# Altium PCB TTFT_LIS2DS12.PcbDoc
Units mil, origin at the board's own origin, x right, y up, seen from the top; angles counter-clockwise.
Board outline 6000 x 4000 mil, 2 copper layers (Top Layer, Bottom Layer); 23 components, 27 nets, 123 pads, 0 vias.
Unrouted connection lines stored in the file: 78.
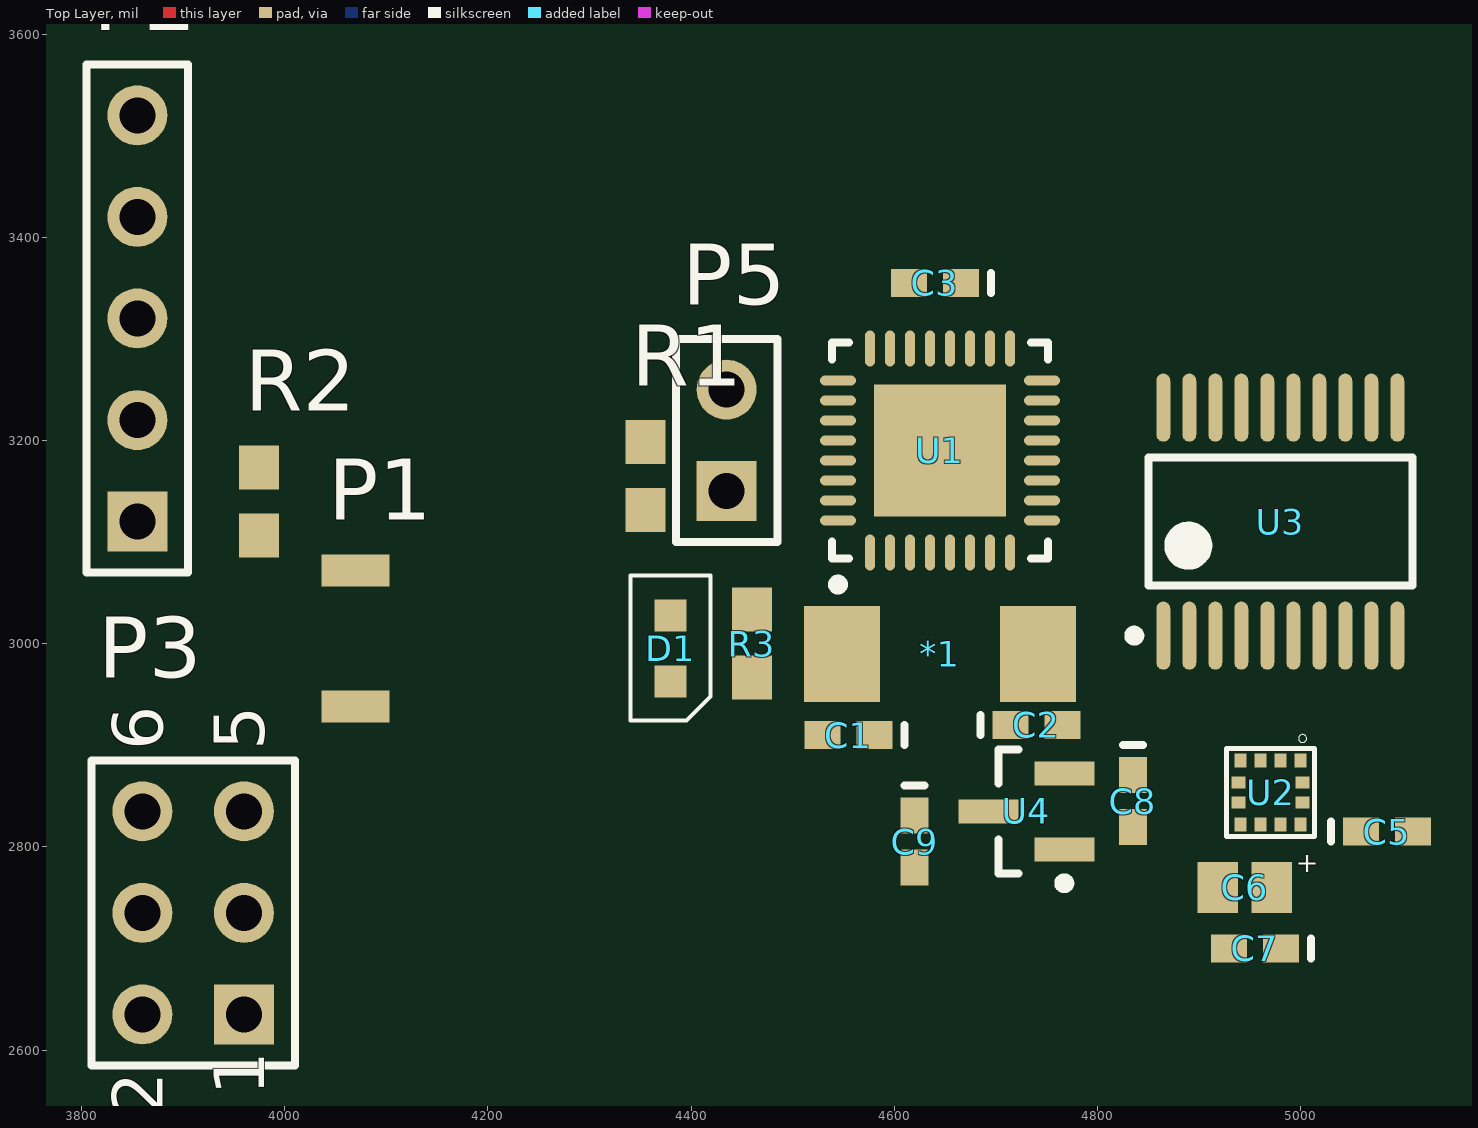
[diagram p0: Top Layer view]
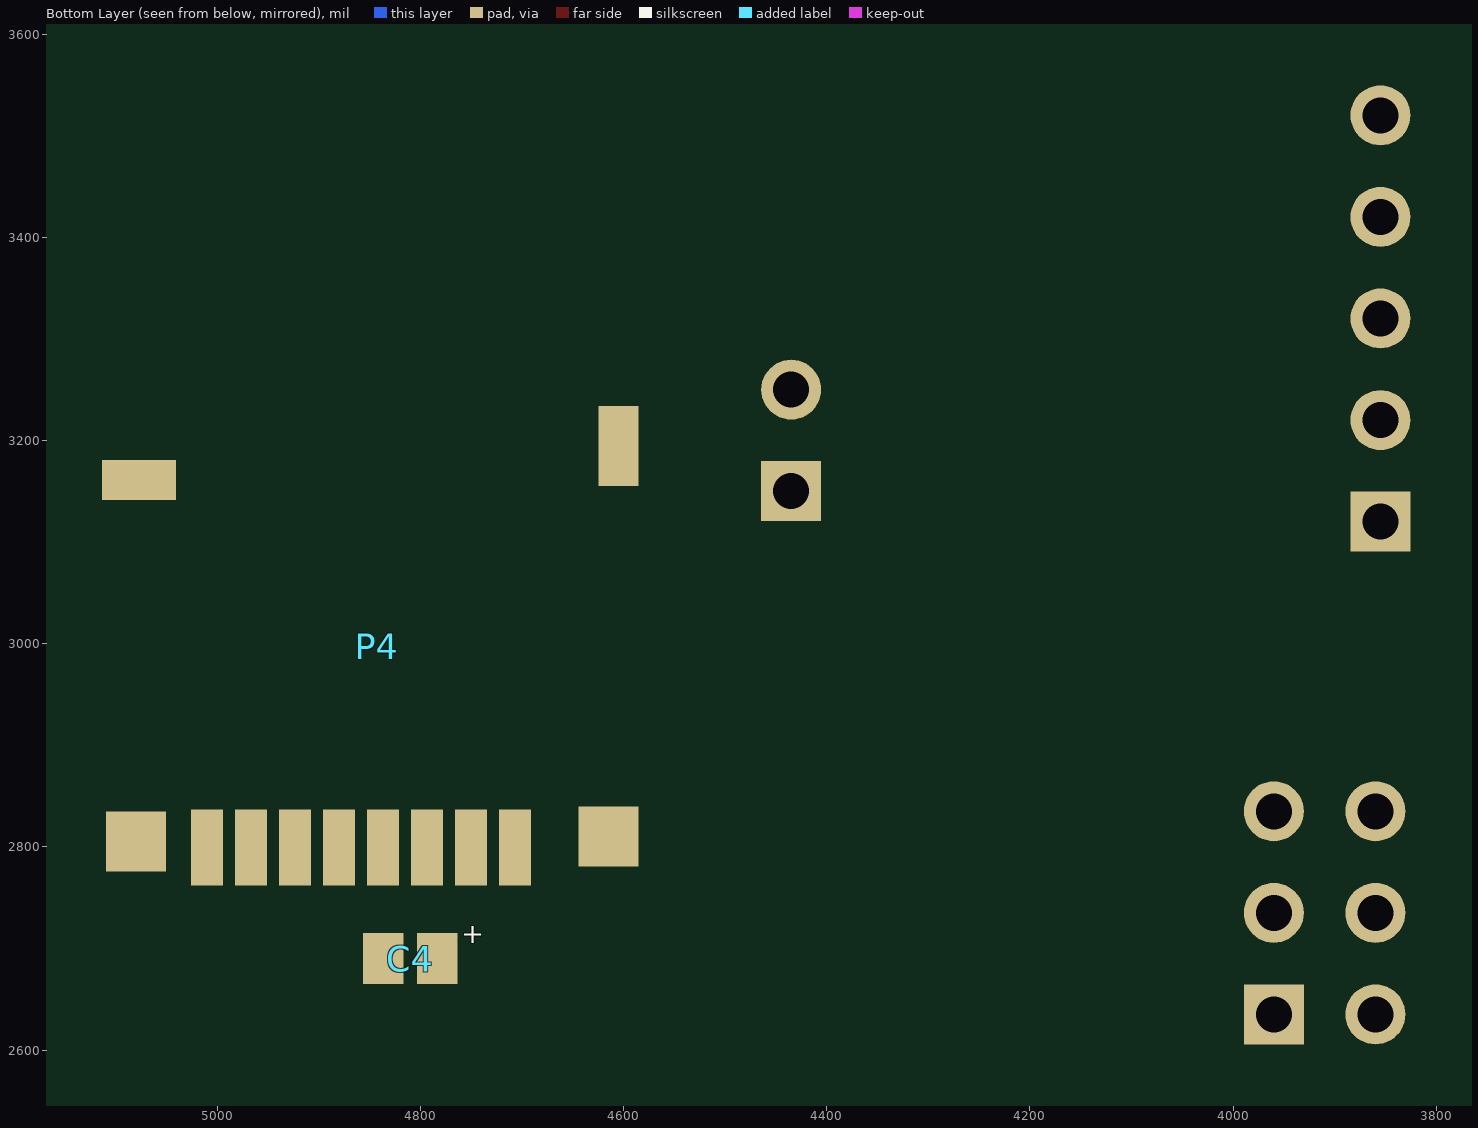
[diagram p1: Bottom Layer view, seen from below]

## Layer stack, top to bottom
Top Solder: solder mask 0.4, Solder Resist, Dk 3.5
Top Layer: signal copper 1.4
Dielectric 1: dielectric 12.6, FR-4, Dk 4.8
Bottom Layer: signal copper 1.4
Bottom Solder: solder mask 0.4, Solder Resist, Dk 3.5

## Board outline
1000,1000 7000,1000 7000,5000 1000,5000

## Design rules (kind name [scope] priority, off if disabled: settings)
Clearance [All] p1: gap=10
PolygonConnect [All] p1: connectstyle=Relief reliefconductorwidth=10 reliefentries=4 polygonreliefangle="90 Angle" airgapwidth=10
RoomDefinition TTFT_LIS2DS12 [InComponentClass('TTFT_LIS2DS12')] p1: confinementstyle=ConfineIn formatcopy=TRUE lockcomponents=FALSE outline 7045,1060 11805,1060 11805,1710 7045,1710
RoutingVias [All] p1: holewidth=28 width=50 viastyle="Through Hole" minholewidth=28 minwidth=50 maxholewidth=28 maxwidth=50
SolderMaskExpansion [All] p1: expansion=4
Width [All] p1: maxlimit=10 minlimit=10 preferedwidth=10
29 further rules are at their usual default settings.

## Components (designator, comment, footprint, x,y, rotation, side; value= is the part's Value field where it differs from the comment)
*1 "8MHz" XTAL-ABM3 4645,2990 r0 top
C1 "100pF" 0402 4555,2910 r180 top
C2 "100pF" 0402 4740,2920 r0 top
C3 "0.1uF" 0402 4640,3355 r180 top
C4 "10uF" Tant0805 4810,2690 r180 bottom
C5 "100nF" 0402 5085,2815 r0 top
C6 "10uF" Tant0805 4945,2760 r0 top
C7 "100nF" 0402 4955,2700 r180 top
C8 "1.0uF" 0402 4835,2845 r270 top
C9 "1.0uF" 0402 4620,2805 r270 top
D1 "LED_0603" Diode0603 4380,2995 r270 top
P1 "Tactile" Tactile-B3U-1000 4070,3005 r270 top
P2 "Header 5" HDR1X5 3855,3120 r90 top
P3 "AVR SPI" HDR2X3 3960,2635 r90 top
P4 "microSD Hirose" "DM3D microSD" 4770,2925 r90 bottom
P5 "Header 2" HDR1X2 4435,3150 r90 top
R1 "10k" 3-0603 4355,3165 r90 top
R2 "omit" 3-0603 3975,3140 r90 top
R3 "330" 3-0603 4460,3000 r90 top
U1 "ATmega8-16AC" 32M1-A_M 4645,3190 r90 top
U2 "LIS2DS12" LGA-12 5000,2885 r270 top
U3 "ST2378E" TSSOP20 4980,3120 r90 top
U4 "MCP1700T-1802E/TT" SOT-23-TT3_N 4730,2835 r180 top

## Footprints (in the part's own frame and the unit in brackets; to place one, negate y for a bottom-side part, rotate by r counter-clockwise, add the part's x,y. Pads: shape width x height; smd on the part's side, far side on the other; paste and mask are expansions set on the pad)
3-0603 [mm] "Chip Resistor; Body 1.6 x 0.9 mm (LxW typ)"
  rect 1.1x1 smd: 1(-0.85,0) 2(0.85,0)
32M1-A_M [mm] "QFN, 32-Leads, Body 5x5mm, Pitch 0.5mm, Thermal Pad 3.3x3.3mm, IPC Low Density"
  oval 0.9x0.25 smd: 1(-2.55,1.75) 2(-2.55,1.25) 3(-2.55,0.75) 4(-2.55,0.25) 5(-2.55,-0.25) 6(-2.55,-0.75) 7(-2.55,-1.25) 8(-2.55,-1.75) 17(2.55,-1.75) 18(2.55,-1.25) 19(2.55,-0.75) 20(2.55,-0.25) 21(2.55,0.25) 22(2.55,0.75) 23(2.55,1.25) 24(2.55,1.75)
  oval 0.25x0.9 smd: 9(-1.75,-2.55) 10(-1.25,-2.55) 11(-0.75,-2.55) 12(-0.25,-2.55) 13(0.25,-2.55) 14(0.75,-2.55) 15(1.25,-2.55) 16(1.75,-2.55) 25(1.75,2.55) 26(1.25,2.55) 27(0.75,2.55) 28(0.25,2.55) 29(-0.25,2.55) 30(-0.75,2.55) 31(-1.25,2.55) 32(-1.75,2.55)
  rect 3.3x3.3 smd paste-1.27 mask+0.102: 33(0,0)
  silkscreen extent -3.47,-2.7 2.7,2.7, body extent -2.55,-2.55 2.55,2.55, height 1
0402 [mm] "Chip Capacitor; Body 1.0 x 0.5 mm (LxW typ)"
  rect 0.9x0.7 smd: 1(-0.65,0) 2(0.65,0)
  silkscreen extent -1.4,-0.25 -1.4,0.25
Diode0603 [mm]
  rect 0.8x0.8 smd: A(-0.825,0) K(0.825,0)
  silkscreen extent -1.83,-1 1.8,1
"DM3D microSD" [mm] "MICROSD_HIROSE Push-Pull"
  rect 1.5x1.5 smd: 0(-3.048,7.874) 0(-2.921,-3.937)
  rect 1x1.85 smd: 0(6,7.8)
  rect 2x1 smd: 0(6.85,-4.191)
  rect 1.9x0.8 smd: 1(-3.188,-1.601) 2(-3.188,-0.501) 3(-3.188,0.599) 4(-3.188,1.699) 5(-3.188,2.799) 6(-3.188,3.899) 7(-3.188,4.999) 8(-3.188,6.099)
  body extent -3.65,-4.45 7.8,7.5, height 1.55
HDR1X2 [mm] "Connector; Header; 2 Position"
  rect 1.5x1.5 hole 0.9: 1(0,0)
  round 1.5 hole 0.9: 2(2.54,0)
  silkscreen extent -1.27,-1.27 3.81,1.27
HDR1X5 [mm] "Connector; Header; 5 Position"
  rect 1.5x1.5 hole 0.9: 1(0,0)
  round 1.5 hole 0.9: 2(2.54,0) 3(5.08,0) 4(7.62,0) 5(10.16,0)
  silkscreen extent -1.27,-1.27 11.43,1.27
HDR2X3 [mm] "Connector; Header; 3x2 Position"
  rect 1.5x1.5 hole 0.9: 1(0,0)
  round 1.5 hole 0.9: 2(0,2.54) 3(2.54,0) 4(2.54,2.54) 5(5.08,0) 6(5.08,2.54)
  silkscreen extent -1.27,-1.27 6.35,3.81
LGA-12 [mm] "LIS2DS12"
  rect 0.35x0.3 smd: 1(0,0) 2(0,-0.5) 3(0,-1) 4(0,-1.5) 7(1.6,-1.5) 8(1.6,-1) 9(1.6,-0.5) 10(1.6,0)
  rect 0.3x0.35 smd: 5(0.55,-1.55) 6(1.05,-1.55) 11(1.05,0.05) 12(0.55,0.05)
  silkscreen extent -0.65,-1.85 1.9,0.35
SOT-23-TT3_N [mm] "SOT23, 3-Leads, Body 2.9x1.3mm, Pitch 0.95mm, Lead Span 2.4mm, IPC Medium Density"
  rect 1.5x0.6 smd: 1(-0.95,0.95) 2(-0.95,-0.95) 3(0.95,0)
  silkscreen extent -1.07,-1.55 0.7,1.92, body extent -0.7,-1.52 0.7,1.53, height 1.12
Tactile-B3U-1000 [mm]
  rect 0.8x1.7 smd: 1(-1.7,0) 2(1.7,0)
Tant0805 [mil]
  rect 40x50 smd: 1(-26.5,0) 2(26.5,0)
TSSOP20 [mm] "TSOP, 20-Leads, Body 6.50x6.40mm, Pitch 0.65mm, IPC Medium Density"
  oval 1.7x0.35 smd: 1(-2.85,2.925) 2(-2.85,2.275) 3(-2.85,1.625) 4(-2.85,0.975) 5(-2.85,0.325) 6(-2.85,-0.325) 7(-2.85,-0.975) 8(-2.85,-1.625) 9(-2.85,-2.275) 10(-2.85,-2.925) 11(2.85,-2.925) 12(2.85,-2.275) 13(2.85,-1.625) 14(2.85,-0.975) 15(2.85,-0.325) 16(2.85,0.325) 17(2.85,0.975) 18(2.85,1.625) 19(2.85,2.275) 20(2.85,2.925)
  silkscreen extent -2.97,-3.3 1.6,3.77, body extent -3.3,-3.3 3.3,3.3, height 1.2
XTAL-ABM3 [mm]
  rect 1.9x2.4 smd: 1(-2.45,0) 2(2.45,0)

## Part data
*1: library part XTAL-ABM3
C1 C2 C3 C5 C7 C8 C9: library part C0402, "Ceramic Chip Capacitor - Standard"
C4 C6: library part Tant0805
P1: library part Tactile_B3U-1000
P2: "Header, 5-Pin"
P3: library part "Header 3X2", "Header, 3-Pin, Dual row"
P5: "Header, 2-Pin"
R1 R2 R3: library part ERJ3RK, "Precision Thick Film Chip Resistor, 10 Ohm to 1M Ohm Range, 1% and 0.5% Tolerance, 0603 Size, 0.063 W"
U1: "8-Bit AVR Microcontroller with 8K Bytes of In-System Programmable Flash Memory"
U4: "Low Quiescent Current LDO, 3-Pin SOT-23, Extended Temperature, Tape and Reel"

## Nets (pads, with @x,y where several pads share a name; then routed paths per layer and width w, separated by ;. In a path a pad name is that pad's centre, name@x,y a point inside that pad or via, vN(x,y) a via of type N, cw(c..) or ccw(c..) an arc to the next point about the centre after c; other vN are vias at no path point)
AGND: C8.2
CS: P4.2 U1.14
CS_LIS: U1.13 U3.17
CS_LIS_1.8: U2.2 U3.4
DTR: P2.1 P3.5 R1.1 R2.1 U1.29
GND: C1.1 C2.1 C3.2 C4.1 C5.2 C6.1 C7.2 C9.2 D1.K P1.1 P2.5 P3.6 P4.6 P5.2 R2.2 U1.3 U1.5 U1.21 U2.6 U2.7 U2.8 U3.8 U3.9 U3.10 U3.12 U3.13 U4.1
INT1: U1.32 U3.15
INT1_1.8: U2.12 U3.6
INT2: U1.1 U3.14
INT2_1.8: U2.11 U3.7
LED1: R3.1 U1.2
LL_OE: U1.12 U3.11
MISO: P3.1 P4.7 U1.16 U3.18
MISO_1.8: U2.3 U3.3
MOSI: P3.4 P4.3 U1.15 U3.19
MOSI_1.8: U2.4 U3.2
Net*1_1: *1.1 C1.2 U1.7
Net*1_2: *1.2 C2.2 U1.8
NetC3_1: C3.1 U1.20
NetD1_A: D1.A R3.2
RXD: P2.3 U1.30
SCK: P3.3 P4.5 U1.17 U3.16
SCK_1.8: U2.1 U3.5
STOP: P1.2 U1.25
TXD: P2.2 U1.31
V1.8: C5.1 C6.2 C7.1 C8.1 U2.9 U2.10 U3.1 U4.2
VCC: C4.2 C9.1 P2.4 P3.2 P4.4 P5.1 R1.2 U1.4 U1.6 U1.18 U3.20 U4.3
pads on no net: P4.0 P4.1 P4.8 U1.9 U1.10 U1.11 U1.19 U1.22 U1.23 U1.24 U1.26 U1.27 U1.28 U1.33 U2.5

## Text inside footprints (layer, text, board x,y; h text height)
C4: Bottom Overlay "+" at 4760,2705 h19.68
C6: Top Overlay "+" at 4995,2775 h19.68
P3: Top Overlay "6" at 3880,2895 h50 r90; Top Overlay "5" at 3980,2895 h50 r90; Top Overlay "2" at 3880,2535 h50 r90; Top Overlay "1" at 3980,2555 h50 r90